# Altium PCB USB_C_Converter.PcbDoc
Units mm, origin at the board's own origin, x right, y up, seen from the top; angles counter-clockwise.
Board outline 29 x 11 mm, 2 copper layers (Top Layer, Bottom Layer); 7 components, 5 nets, 49 pads, 10 vias.
Unrouted connection lines stored in the file: 8.
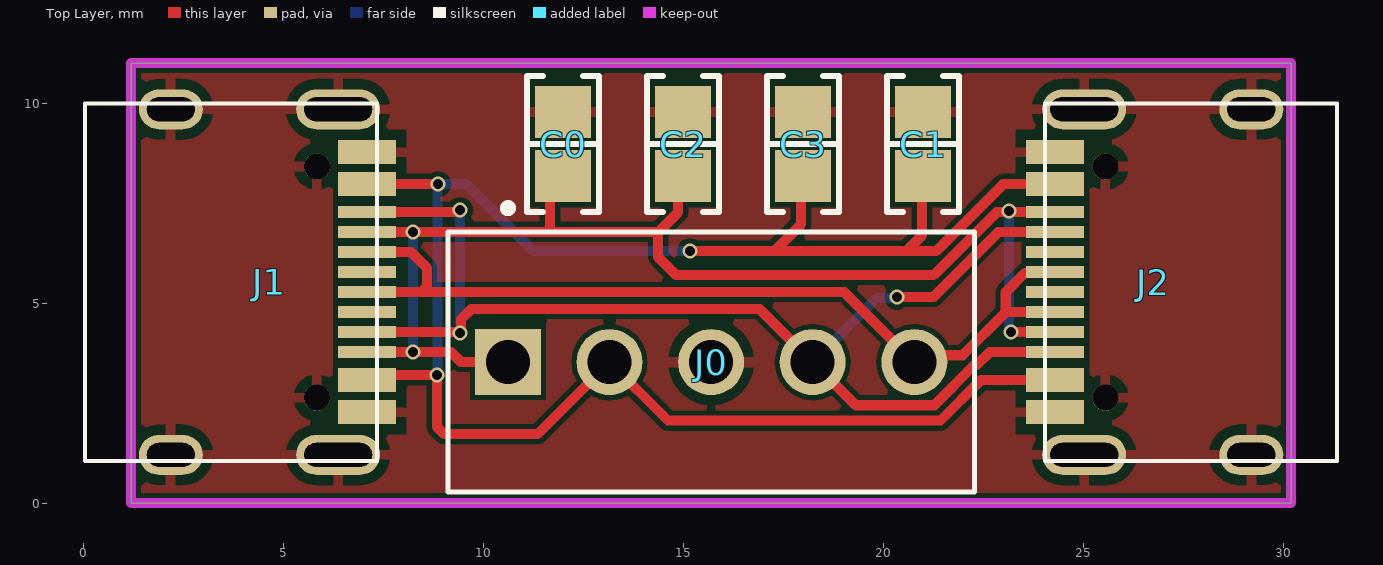
[diagram p0: Top Layer view]
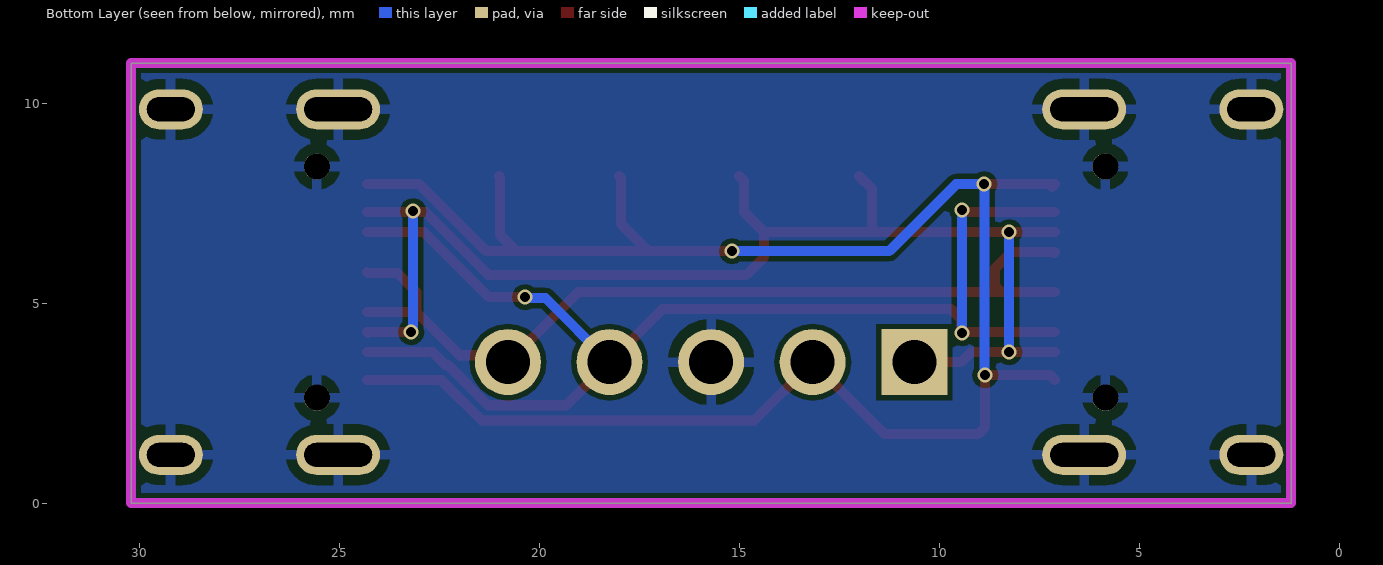
[diagram p1: Bottom Layer view, seen from below]
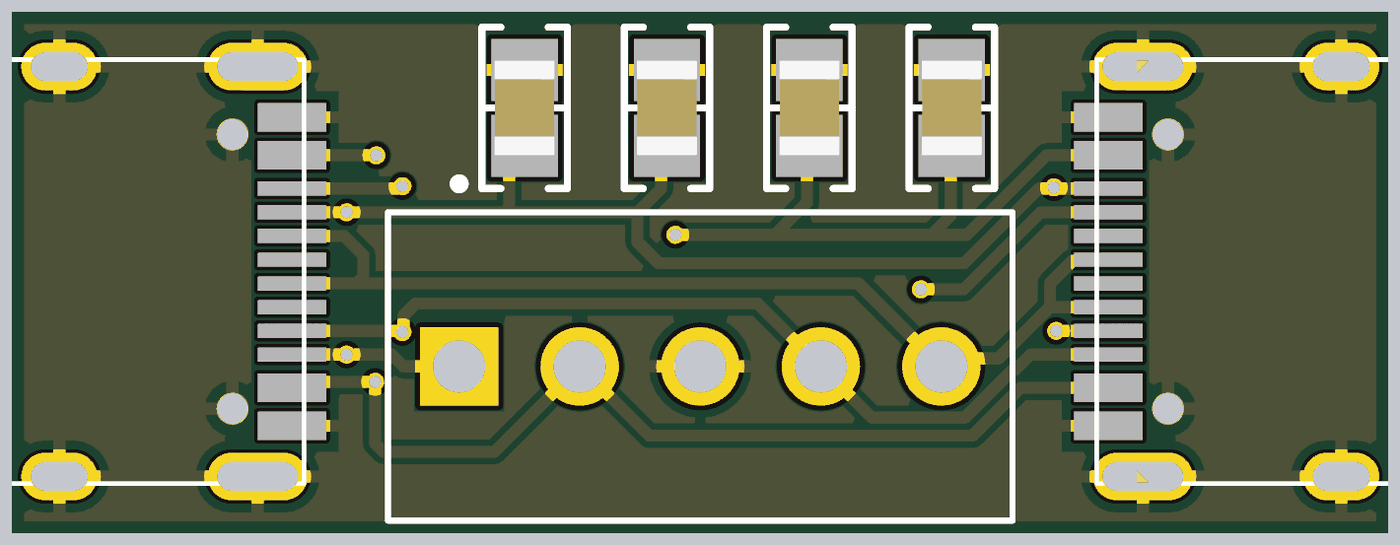
[diagram p2: 3D render of the assembled board from above, using the file's embedded part models]

## Layer stack, top to bottom
Top Solder: solder mask 0.0102, Solder Resist, Dk 3.5
Top Layer: signal copper 0.0356
Dielectric 1: dielectric 0.32, FR-4, Dk 4.8
Bottom Layer: signal copper 0.0356
Bottom Solder: solder mask 0.0102, Solder Resist, Dk 3.5

## Board outline
1.2,11 30.2,11 30.2,0 1.2,0

## Design rules (kind name [scope] priority, off if disabled: settings)
Clearance Clearance_M0BGA_Fanout [WithinRoom('M0BGA_Fanout')] p1: gap=0.065 ignorepadtopadclearanceinfootprint=FALSE except(0: Arc-Hole Track-Hole SMDPad-Hole THPad-Hole Via-Hole Fill-Hole Poly-Hole Region-Hole Text-Hole)
Clearance [All] p2: gap=0.127 ignorepadtopadclearanceinfootprint=FALSE except(0: Arc-Hole Track-Hole SMDPad-Hole THPad-Hole Via-Hole Fill-Hole Poly-Hole Region-Hole Text-Hole)
ComponentClearance [All] p1: gap=0.203 collisioncheckmode=3 verticalgap=0.203 showdistances=FALSE
FanoutControl Fanout_BGA [IsBGA] p1: bgadir=Out bgaviamode=Centered fanoutstyle=BGA fanoutdirection=Alternating viagrid=0.025 // Fanout_BGA (Default Rule)
HoleSize [All] p1: absolutevalues=TRUE maxlimit=2.54 minlimit=0.254 maxpercent=80.000 minpercent=20.000
HoleToHoleClearance [All] p1: gap=0.152 allowstackedmicrovias=TRUE
MinimumAnnularRing [All] p1: minimumring=0.005
MinimumSolderMaskSliver MinimumSolderMaskSliver_M0BGA_Fanout [All] p1: minsoldermaskwidth=0.1
MinimumSolderMaskSliver [All] p2: minsoldermaskwidth=0.127
PlaneClearance [All] p1: clearance=0.254
PolygonConnect [All] p1: connectstyle=Relief reliefconductorwidth=0.254 reliefentries=4 polygonreliefangle="90 Angle" airgapwidth=0.254
RoutingVias RoutingVias_M0BGA_Fanout [WithinRoom('M0BGA_Fanout')] p1: holewidth=0.1 width=0.2 viastyle="Through Hole" minholewidth=0.1 minwidth=0.2 maxholewidth=0.1 maxwidth=0.2
RoutingVias [All] p2: holewidth=0.076 width=0.178 viastyle="Through Hole" minholewidth=0.076 minwidth=0.178 maxholewidth=0.254 maxwidth=0.38
SilkToSilkClearance [All] p1: silktosilkclearance=0.127
SilkToSolderMaskClearance [IsPad] p1: minsilkscreentomaskgap=0.076 clearancetoexposedcopper=TRUE
SolderMaskExpansion SolderMaskExpansion_M0BGA_Fanout [WithinRoom('M0BGA_Fanout')] p1: expansion=0.01 istentingtop=FALSE
SolderMaskExpansion [All] p2: expansion=0.102 istentingtop=FALSE
UnRoutedNet [All] p1: checkbadconnections=TRUE
Width Width_M0BGA_Fanout [WithinRoom('M0BGA_Fanout')] p1: maxlimit=0.065 minlimit=0.065 preferedwidth=0.065 minimp=50.000000 maximp=50.000000 favimp=50.000000
Width [All] p2: maxlimit=12.7 minlimit=0.065 preferedwidth=0.254 minimp=50.000000 maximp=50.000000 favimp=50.000000
21 further rules are at their usual default settings.

## Components (designator, comment, footprint, x,y, rotation, side; value= is the part's Value field where it differs from the comment)
C0 "0.1µF" "CAP 0805_2012" 12,8.975 r270 top
C1 "0.1µF" "CAP 0805_2012" 21,8.975 r270 top
C2 "4.7µF" "CAP 0805_2012" 15,8.975 r270 top
C3 "4.7µF" "CAP 0805_2012" 18,8.975 r270 top
J0 "282834-5" *TE_282834-5 15.7,3.525 r0 top
J1 "USB-C Socket" TYPE-C-31-M-12 3.7,5.525 r270 top
J2 "USB-C Socket" TYPE-C-31-M-12 27.7,5.525 r90 top

## Footprints (in the part's own frame and the unit in brackets; to place one, negate y for a bottom-side part, rotate by r counter-clockwise, add the part's x,y. Pads: shape width x height; smd on the part's side, far side on the other; paste and mask are expansions set on the pad)
*TE_282834-5 [mm]
  rect 1.65x1.65 hole 1.1: 1(-5.08,0)
  round 1.65 hole 1.1: 2(-2.54,0) 3(0,0) 4(2.54,0) 5(5.08,0)
  silkscreen extent -6.58,-3.25 6.58,3.95
"CAP 0805_2012" [mm] "Chip Capacitor, 2-Leads, Body 2.00x1.20mm, IPC Medium Density"
  rect 1.3x1.4 smd: 1(-0.8,0) 2(0.8,0)
  silkscreen extent -1.7,-0.9 1.7,0.9, body extent -1,-0.64 1,0.64, height 1.26
TYPE-C-31-M-12 [mm]
  rect 0.6x1.45 smd paste+0 mask+0.075: 0(-3.25,3.4)
  rect 0.6x1.45 smd mask+0.075: 1(-2.45,3.4) 10(2.45,3.4) 11(3.25,3.4)
  rect 0.3x1.45 smd mask+0.075: 2(-1.75,3.4) 3(-1.25,3.4) 4(-0.75,3.4) 5(-0.25,3.4) 6(0.25,3.4) 7(0.75,3.4) 8(1.25,3.4) 9(1.75,3.4)
  oval 1x2.1 hole 1.7 slot 0.6 at 0 deg mask+0.075: 12(-4.32,2.675) 12(4.32,2.675)
  oval 1x1.6 hole 1.2 slot 0.6 at 0 deg mask+0.075: 12(-4.32,-1.505) 12(4.32,-1.505)
  round 0.65 hole 0.65 mask+0: 12(-2.89,2.145) 12(2.89,2.145)
  silkscreen extent -4.47,-3.65 4.47,3.65

## Part data
C0 C1: library part LLA219R71C104MA01L, "CAP CER 0.1UF 16V X7R 0805", Device Package="0805 (2012 Metric)", Manufacturer="Murata Electronics", Operating Temperature="-55°C ~ 125°C", Supplier Part Number 1=490-4414-1-ND, Temperature Coefficient=X7R, Tolerance=±20%, Voltage - Rated=16V, Applications="Bypass, Decoupling", Capacitance=0.1µF, ComponentLink1Description=Datasheet, ComponentLink1URL=https://www.murata.com/~/media/webrenewal/support/library/catalog/products/capacitor/mlcc/c02e.ashx?la=en-us, ComponentLink2Description="DigiKey Link", ComponentLink2URL=http://digikey.com/product-detail/en/murata-electronics/LLA219R71C104MA01L/490-4414-1-ND/1022558, Features="Low ESL (Multi-Terminal)", LastUpdated="1/19/2020 4:08:48 PM", Lifecycle Status=Active, Minimum Order=1, Mounting Type="Surface Mount, MLCC", Package / Case="0805 (2012 Metric)", Packaging=TapeAndReel, Part Number=LLA219R71C104MA01L, Part Status=Active, PartId=15142, Price=0.08, Series=LLA, Size / Dimension="0.079\" L x 0.049\" W (2.00mm x 1.25mm)", Supplier 1=DigiKey, Thickness (Max)="0.037\" (0.95mm)"
C2 C3: library part GRM21BR71C475KE51L, "CAP CER 4.7UF 16V X7R 0805", Device Package="0805 (2012 Metric)", Manufacturer="Murata Electronics", Operating Temperature="-55°C ~ 125°C", Supplier Part Number 1=490-14466-1-ND, Temperature Coefficient=X7R, Tolerance=±10%, Voltage - Rated=16V, Applications="General Purpose", Capacitance=4.7µF, ComponentLink1Description=Datasheet, ComponentLink1URL=https://search.murata.co.jp/Ceramy/image/img/A01X/G101/ENG/GRM21BR71C475KE51-01.pdf, ComponentLink2Description="DigiKey Link", ComponentLink2URL=http://digikey.com/product-detail/en/murata-electronics/GRM21BR71C475KE51L/490-14466-1-ND/6606927, LastUpdated="1/19/2020 4:08:58 PM", Lifecycle Status=Active, Minimum Order=1, Mounting Type="Surface Mount, MLCC", Package / Case="0805 (2012 Metric)", Packaging=TapeAndReel, Part Number=GRM21BR71C475KE51L, Part Status=Active, PartId=8696, Price=0.04, Series=GRM, Size / Dimension="0.079\" L x 0.049\" W (2.00mm x 1.25mm)", Supplier 1=DigiKey, Thickness (Max)="0.055\" (1.40mm)"
J0: "Buchanan; Conn; Term Blk; PCB; 5; 2.54mm; Front; 30-16 AWG; Green; 10 A; 150 V", Package=None, Availability=Unavailable, EU_RoHS_Compliance="Compliant with Exemptions", MF="TE Connectivity", MP=282834-5, Price=None, SnapEDA_Link=https://www.snapeda.com/parts/282834-5/TE%20Connectivity%20AMP%20Connectors/view-part/641357/?ref=snap, TE_purchase_URL=https://www.te.com/usa-en/product-282834-5.html?te_bu=Cor&te_type=disp&te_campaign=seda_glo_cor-seda-global-disp-prtnr-fy19-seda-model-bom-cta_sma-317_1&elqCampaignId=32493
J1 J2: library part TYPE-C-31-M-12

## Via types
v1: diameter 0.38, hole 0.254, Top Layer to Bottom Layer, 10 vias

## Nets (pads, with @x,y where several pads share a name; then routed paths per layer and width w, separated by ;. In a path a pad name is that pad's centre, name@x,y a point inside that pad or via, vN(x,y) a via of type N, cw(c..) or ccw(c..) an arc to the next point about the centre after c; other vN are vias at no path point)
+5: C1.2 C3.2 J0.2 J1.1 J1.10 J2.1 J2.10 | length 48.1
  Top Layer w0.254: J1.10 7.225,3.2 v1(8.85,3.2) 8.85,1.9 9.025,1.725 11.36,1.725 J0.2 14.62,2.065 21.435,2.065 22.445,3.075 J2.1 ; J1.1@7.175,7.9 J1.1 v1(8.875,7.975) ; v1(15.175,6.3) 17.275,6.3 ; C3.2 17.95,8.125 17.95,6.975 17.275,6.3 ; C1.2 20.975,8.15 20.975,6.7 20.575,6.3 ; J2.10 23,7.975 21.325,6.3 20.575,6.3 ; 17.275,6.3 20.575,6.3
  Bottom Layer w0.254: v1(8.85,3.2) 8.862,3.213 8.862,7.963 v1(8.875,7.975) 9.575,7.975 11.25,6.3 v1(15.175,6.3) v1@15.2,6.3
+12: C0.2 C2.2 J0.1 J1.3 J1.9 J2.3 J2.9 | length 32.7
  Top Layer w0.254: J1.9 v1(8.25,3.775) 9.2,3.775 9.45,3.525 J0.1 ; J1.3 v1(8.25,6.775) 11.575,6.775 ; C0.2 11.675,7.85 11.675,6.875 11.575,6.775 ; C2.2 14.875,8.05 14.875,7.275 14.375,6.775 ; v1(23.2,4.275) J2.3 J2.3@24.278,4.252 ; J2.9 22.839,7.275 21.264,5.7 14.825,5.7 14.375,6.15 14.375,6.775 ; 11.575,6.775 14.375,6.775
  Bottom Layer w0.254: v1(8.25,3.775) v1(8.25,6.775) ; v1(23.15,7.3) 23.15,4.359 23.2,4.309 v1(23.2,4.275)
"CAN H": J0.4 J1.2 J1.8 J2.2 J2.8 | length 32
  Top Layer w0.254: J1.8 9.4,4.275 v1(9.425,4.25) 9.449,4.274 9.449,4.599 9.7,4.85 16.915,4.85 J0.4 19.319,2.446 21.277,2.446 22.287,3.456 22.344,3.456 22.663,3.775 J2.2 ; J1.2 9.375,7.275 v1(9.425,7.325) ; v1(20.35,5.15) 21.253,5.15 22.878,6.775 J2.8
  Bottom Layer w0.254: v1(9.425,4.25) v1(9.425,7.325) ; J0.4 19.841,5.126 20.326,5.126 v1(20.35,5.15)
"CAN L": J0.5 J1.4 J1.6 J2.4 J2.6 | length 22.7
  Top Layer w0.254: J1.6 8.451,5.275 ; J1.4@7.123,6.252 J1.4 8.2,6.275 8.6,5.875 8.6,5.424 8.451,5.275 ; J2.4 23.067,4.775 ; J2.6 24.278,5.752 23.544,5.752 23.067,5.275 23.067,4.775 ; 8.451,5.275 19.03,5.275 J0.5 20.95,3.694 21.986,3.694 23.067,4.775
GND: C0.1 C1.1 C2.1 C3.1 J0.3 J1.0 J1.11 J1.12 J2.0 J2.11 J2.12
pads on no net: J1.5 J1.7 J2.5 J2.7

## Polygon pours and split planes (outlines as drawn)
GND on Bottom Layer "GND_L02_P001" (solid, pour order 1): 1.2,11 30.2,11 30.2,0 1.2,0
GND on Top Layer "GND_L01_P000" (solid, pour order 0): 1.2,11 30.2,11 30.2,0 1.2,0

## Keep-outs
Keep-Out Layer:
  the board outline again, w0.254